# EAGLE board Design Palette PCB v17 (EAGLE 9.7.0)
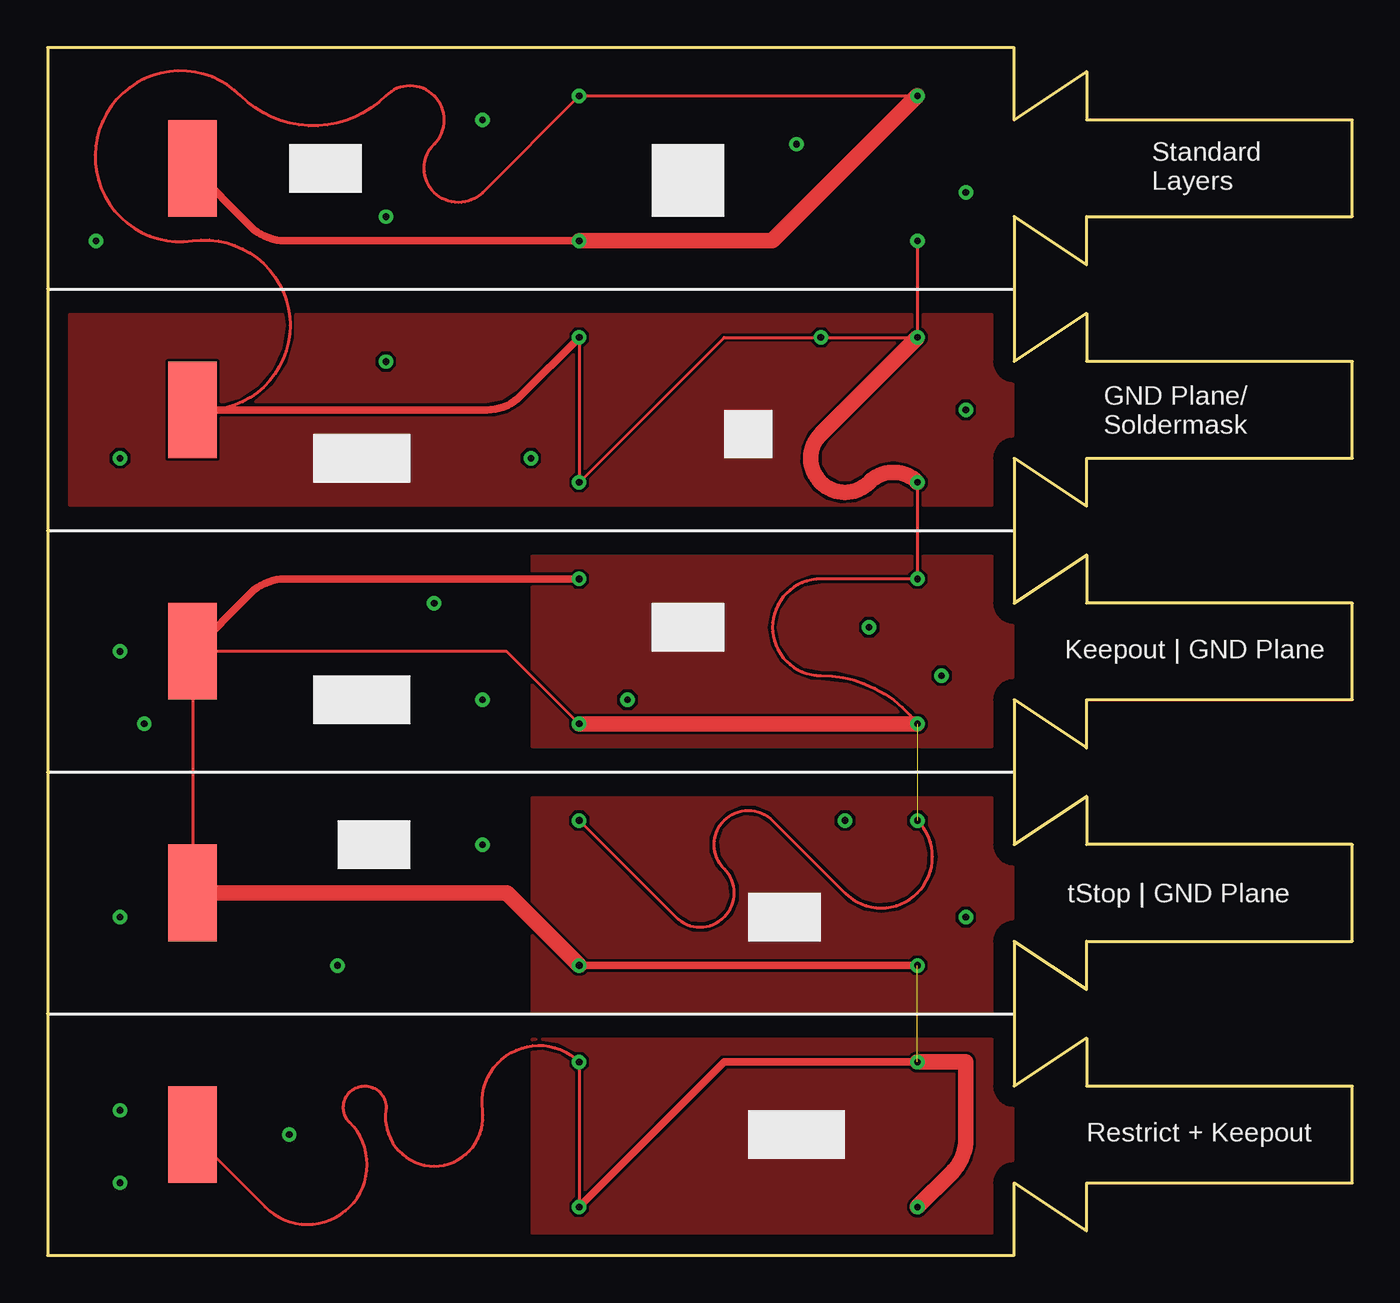
[diagram p0: board, top side]
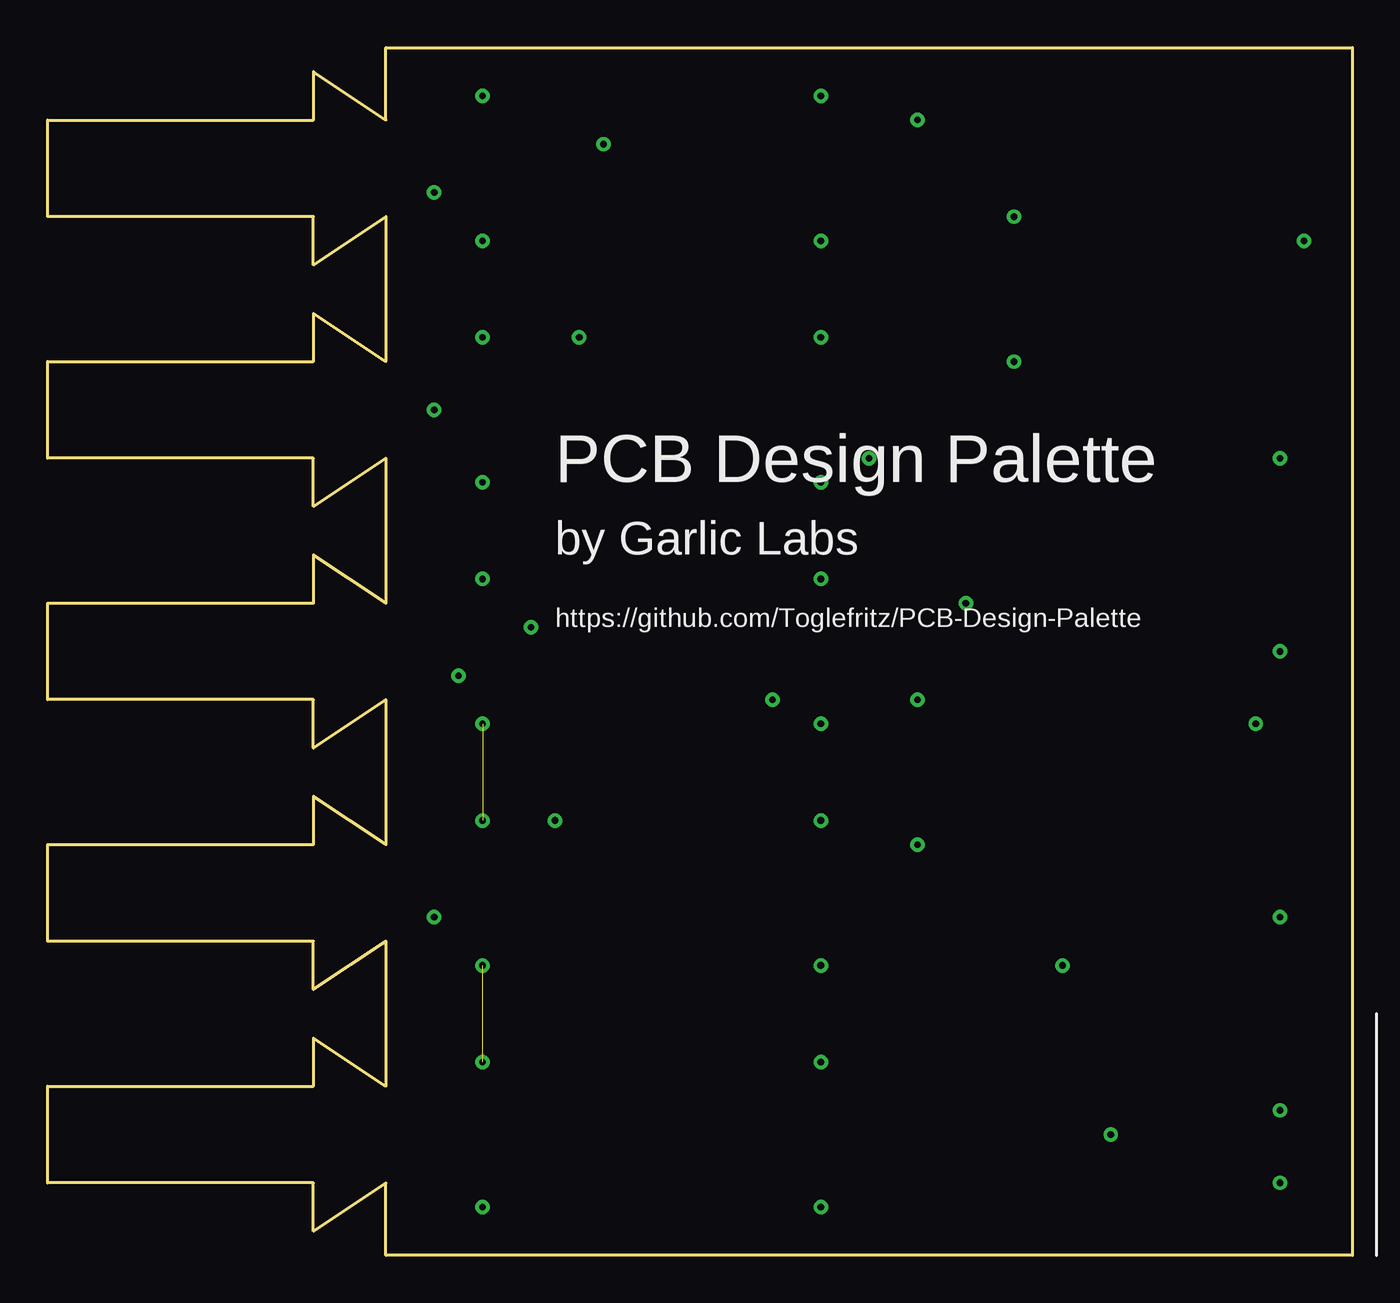
[diagram p1: board, bottom side, seen from below]

Size 68.58 x 63.5 mm. Coordinates in mm from the lower left corner, seen from the top.
Outline: 0,0 50.8,0 50.8,3.81 54.61,1.27 54.61,3.81 68.58,3.81 68.58,8.89 54.61,8.89 54.61,11.43 50.8,8.89 50.8,16.51 54.61,13.97 54.61,16.51 68.58,16.51 68.58,21.59 54.61,21.59 54.61,24.13 50.8,21.59 50.8,29.21 54.61,26.67 54.61,29.21 68.58,29.21 68.58,34.29 54.61,34.29 54.61,36.83 50.8,34.29 50.8,41.91 54.61,39.37 54.61,41.91 68.58,41.91 68.58,46.99 54.61,46.99 54.61,49.53 50.8,46.99 50.8,54.61 54.61,52.07 54.61,54.61 68.58,54.61 68.58,59.69 54.61,59.69 54.61,62.23 50.8,59.69 50.8,63.5 0,63.5 0,0
Copper layers (1*16): Top / Bottom
Stack-up Default Layer Stack: Top User Defined 0.035mm / Dielectric-1 User Defined 1.5mm / Bottom User Defined 0.035mm
Design rules "default": minimum track width 6mil, minimum drill 0.35mm, track to track 6mil, track to pad 6mil, pad to pad 6mil, via to via 6mil, smd to smd 6mil, copper to edge 40mil, drill to drill 6mil, minimum pad ring 10mil, minimum via ring 8mil, stop-mask expansion 4mil, vias tented up to drill 0mil, thermal gap 10mil
tKeepout: area 1.3,26.7 to 49.5,36.8; area 1.3,1.3 to 49.5,11.4

## Footprints (pad centres in the part's own frame; a part is rotated, then mirrored left to right if it is on the bottom)
SMD2,54-5,08 = smd 2.54 x 5.08: 1 0,0

## Placement (x,y rotation side)
PAD1  WIREPADSMD2,54-5,08  [SMD2,54-5,08]  7.62,57.15 0 top
PAD2  WIREPADSMD2,54-5,08  [SMD2,54-5,08]  7.62,44.45 0 top
PAD3  WIREPADSMD2,54-5,08  [SMD2,54-5,08]  7.62,31.75 0 top
PAD4  WIREPADSMD2,54-5,08  [SMD2,54-5,08]  7.62,19.05 0 top
PAD5  WIREPADSMD2,54-5,08  [SMD2,54-5,08]  7.62,6.35 0 top

## Library data of the parts
PAD1-PAD5 = wirepad

## Nets
NET: PAD1.1 PAD2.1 PAD3.1 PAD4.1 PAD5.1

## Tracks (layer width: path | path; a pad name or v marks a point on that pad's centre or on a via)
N$1
  pour Top: 50.8,39.37 0,39.37 0,49.53 50.8,49.53
N$2
  pour Top: 25.4,36.83 25.4,26.67 50.8,26.67 50.8,36.83
N$3
  pour Top: 25.4,24.13 25.4,12.7 50.8,12.7 50.8,24.13
N$4  (via drill 0.35)
  other vias: 2.54,53.34
N$5  (via drill 0.35)
  other vias: 22.86,59.69
N$6  (via drill 0.35)
  other vias: 17.78,54.61
N$7  (via drill 0.35)
  other vias: 39.37,58.42
N$8  (via drill 0.35)
  other vias: 48.26,55.88
N$9  (via drill 0.35)
  other vias: 48.26,44.45
N$10  (via drill 0.35)
  other vias: 25.4,41.91
N$11  (via drill 0.35)
  other vias: 17.78,46.99
N$12  (via drill 0.35)
  other vias: 3.81,41.91
N$13  (via drill 0.35)
  other vias: 3.81,31.75
N$14  (via drill 0.35)
  other vias: 5.08,27.94
N$15  (via drill 0.35)
  other vias: 20.32,34.29
N$16  (via drill 0.35)
  other vias: 22.86,29.21
N$17  (via drill 0.35)
  other vias: 30.48,29.21
N$18  (via drill 0.35)
  other vias: 43.18,33.02
N$19  (via drill 0.35)
  other vias: 46.99,30.48
N$20  (via drill 0.35)
  other vias: 48.26,17.78
N$21  (via drill 0.35)
  other vias: 41.91,22.86
N$22  (via drill 0.35)
  other vias: 22.86,21.59
N$23  (via drill 0.35)
  other vias: 15.24,15.24
N$24  (via drill 0.35)
  other vias: 3.81,17.78
N$25  (via drill 0.35)
  other vias: 12.7,6.35
N$26  (via drill 0.35)
  other vias: 3.81,3.81
N$27  (via drill 0.35)
  other vias: 3.81,7.62
N$28
  pour Top: 25.4,11.43 25.4,0 50.8,0 50.8,11.43
NET  (via drill 0.35)  (2 unrouted)
  Top 0.152: v45.72,60.96 v27.94,60.96 22.86,55.88 arc-180 20.32,58.42 arc180 17.78,60.96 arc-90 10.16,60.96 arc233 7.62,53.34 arc-196 PAD2.1 | v27.94,48.26 v27.94,40.64 35.56,48.26 v40.64,48.26 v45.72,48.26 v45.72,53.34 | v45.72,40.64 v45.72,35.56 40.64,35.56 arc180 40.64,30.48 arc-53 v45.72,27.94 | v27.94,27.94 24.13,31.75 PAD3.1 PAD4.1 | v27.94,22.86 33.02,17.78 arc180 35.56,20.32 arc-180 38.1,22.86 41.91,19.05 arc180 v45.72,22.86 | PAD5.1 11.43,2.54 arc180 15.88,6.99 arc-233 17.78,7.62 arc196 22.86,7.62 arc-143 v27.94,10.16 v27.94,2.54
  Top 0.406: v27.94,53.34 12.48,53.34 arc-45 10.69,54.08 PAD1.1 | PAD2.1 23.08,44.45 arc45 24.87,45.19 v27.94,48.26 | PAD3.1 10.69,34.82 arc-45 12.48,35.56 v27.94,35.56 | v27.94,15.24 v45.72,15.24 | v27.94,2.54 35.56,10.16 v45.72,10.16
  Top 0.813: v45.72,60.96 38.1,53.34 v27.94,53.34 | v45.72,48.26 40.64,43.18 arc180 43.18,40.64 arc-90 v45.72,40.64 | v45.72,27.94 v27.94,27.94 | PAD4.1 24.13,19.05 v27.94,15.24 | v45.72,2.54 47.52,4.34 arc45 48.26,6.13 48.26,10.16 v45.72,10.16

## Text on the board
tPlace: Standard / Layers | GND Plane/ / Soldermask | Keepout | GND Plane | tStop | GND Plane | Restrict + Keepout
bPlace: PCB Design Palette | by Garlic Labs | https://github.com/Toglefritz/PCB-Design-Palette